# Altium PCB LAN_Tap_RJ54_x6.PcbDoc
Units mm, origin at the board's own origin, x right, y up, seen from the top; angles counter-clockwise.
Board outline 153.29 x 98.04 mm, 2 copper layers (Top Layer, Bottom Layer); 24 components, 0 nets, 288 pads, 0 vias.
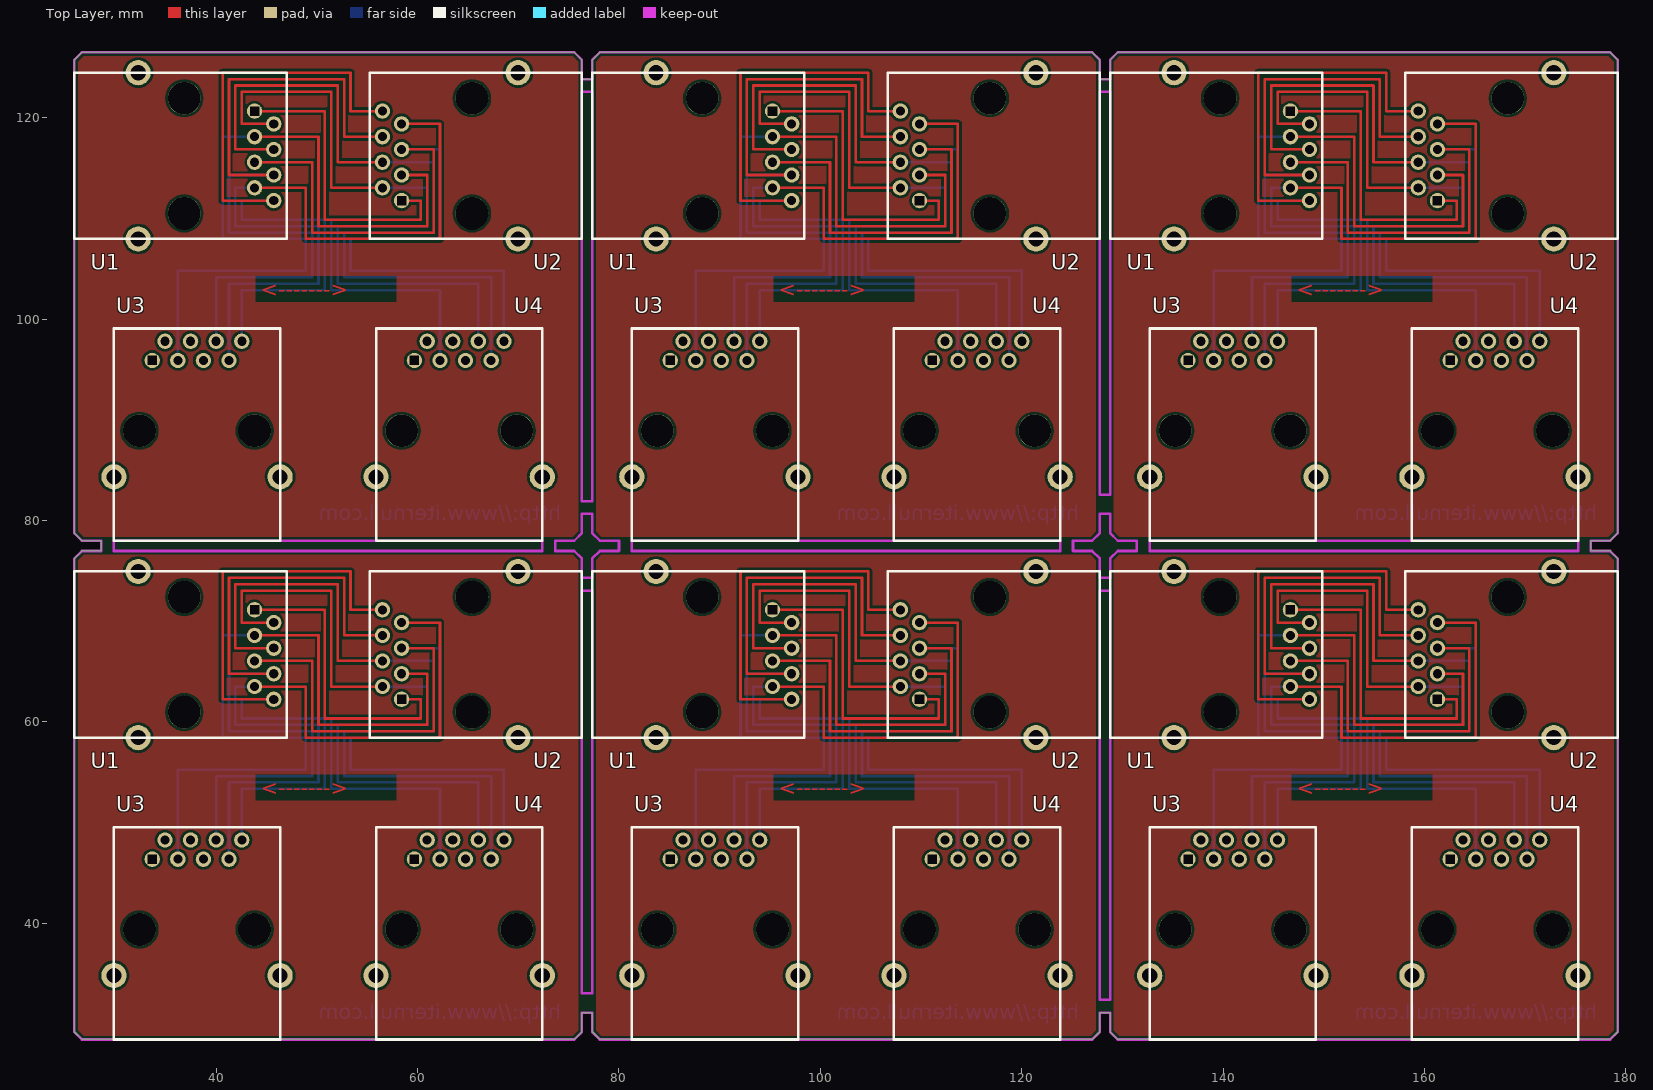
[diagram p0: Top Layer view]
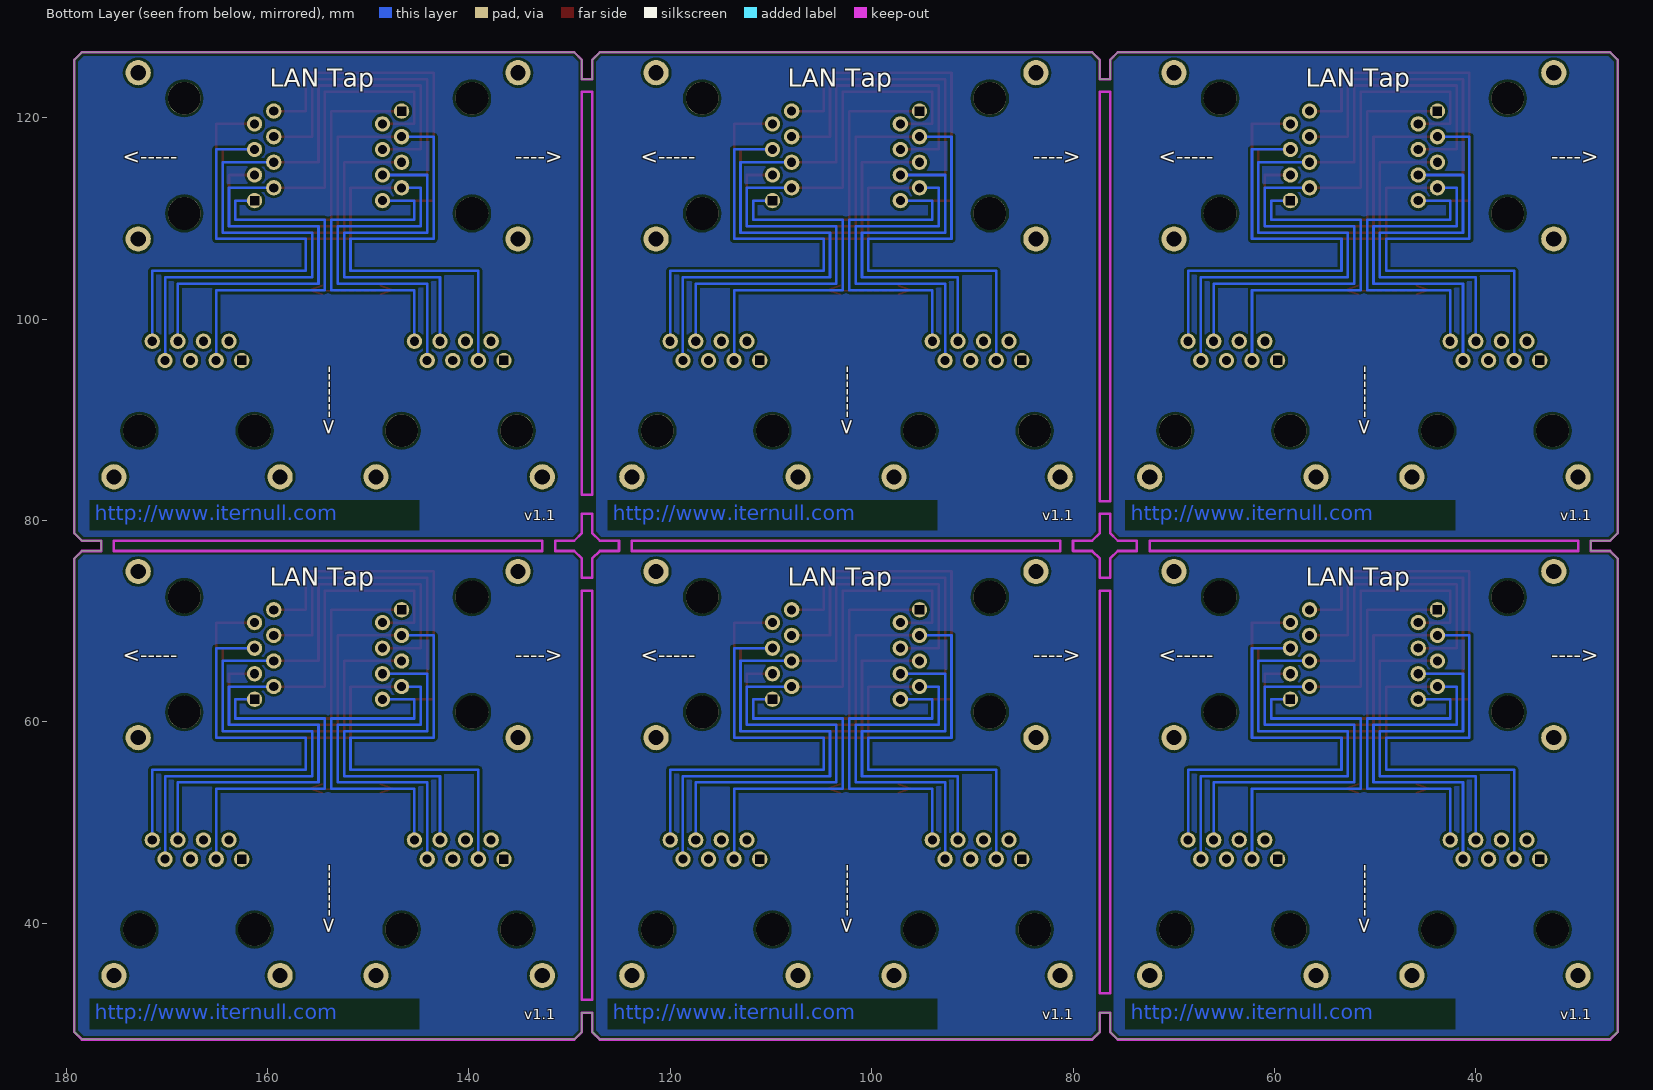
[diagram p1: Bottom Layer view, seen from below]

## Layer stack, top to bottom
Top Solder: solder mask 0.0102, Solder Resist, Dk 3.5
Top Layer: signal copper 0.0356
Dielectric 1: dielectric 0.32, FR-4, Dk 4.8
Bottom Layer: signal copper 0.0356
Bottom Solder: solder mask 0.0102, Solder Resist, Dk 3.5

## Board outline
25.908,125.73 25.908,78.74 26.67,77.978 28.448,77.978 28.575,77.978 28.575,76.962 26.67,76.962 25.908,76.2 25.908,29.21 26.67,28.448 75.565,28.448 76.327,29.21 76.327,31.115 77.343,31.115 77.343,29.21 78.105,28.448 127,28.448 127.762,29.21 127.762,31.115 128.778,31.115 128.778,29.21 129.54,28.448 178.435,28.448 179.197,29.21 179.197,76.2 178.435,76.962 176.53,76.962 176.53,77.978 178.435,77.978 179.197,78.74 179.197,125.73 178.435,126.492 129.54,126.492 128.778,125.73 128.778,123.825 127.762,123.825 127.762,125.73 127,126.492 78.105,126.492 77.343,125.73 77.343,123.825 76.327,123.825 76.327,125.73 75.565,126.492 26.67,126.492 25.908,125.73

## Design rules (kind name [scope] priority, off if disabled: settings)
Clearance [All] p1: gap=0.254
PolygonConnect [All] p1: connectstyle=Relief reliefconductorwidth=0.254 reliefentries=4 polygonreliefangle="90 Angle" airgapwidth=0.254
RoutingVias [All] p1: holewidth=0.711 width=1.27 viastyle="Through Hole" minholewidth=0.711 minwidth=1.27 maxholewidth=0.711 maxwidth=1.27
SolderMaskExpansion [All] p1: expansion=0.102
UnpouredPolygon [All] p1: allowunpoured=FALSE
Width [All] p1: maxlimit=0.254 minlimit=0.254 preferedwidth=0.254
29 further rules are at their usual default settings.

## Components (designator, comment, footprint, x,y, rotation, side; value= is the part's Value field where it differs from the comment)
U1 "RJ45" rj45 147.32,71.755 r270 top
U1 "RJ45" rj45 147.32,121.285 r270 top
U1 "RJ45" rj45 95.885,71.755 r270 top
U1 "RJ45" rj45 95.885,121.285 r270 top
U1 "RJ45" rj45 44.45,71.755 r270 top
U1 "RJ45" rj45 44.45,121.285 r270 top
U2 "RJ45" rj45 160.655,61.595 r90 top (schematic designator U1)
U2 "RJ45" rj45 160.655,111.125 r90 top (schematic designator U1)
U2 "RJ45" rj45 109.22,61.595 r90 top (schematic designator U1)
U2 "RJ45" rj45 109.22,111.125 r90 top (schematic designator U1)
U2 "RJ45" rj45 57.785,61.595 r90 top (schematic designator U1)
U2 "RJ45" rj45 57.785,111.125 r90 top (schematic designator U1)
U3 "RJ45" rj45 135.89,46.99 r0 top (schematic designator U1)
U3 "RJ45" rj45 135.89,96.52 r0 top (schematic designator U1)
U3 "RJ45" rj45 84.455,46.99 r0 top (schematic designator U1)
U3 "RJ45" rj45 84.455,96.52 r0 top (schematic designator U1)
U3 "RJ45" rj45 33.02,46.99 r0 top (schematic designator U1)
U3 "RJ45" rj45 33.02,96.52 r0 top (schematic designator U1)
U4 "RJ45" rj45 161.925,46.99 r0 top (schematic designator U1)
U4 "RJ45" rj45 161.925,96.52 r0 top (schematic designator U1)
U4 "RJ45" rj45 110.49,46.99 r0 top (schematic designator U1)
U4 "RJ45" rj45 110.49,96.52 r0 top (schematic designator U1)
U4 "RJ45" rj45 59.055,46.99 r0 top (schematic designator U1)
U4 "RJ45" rj45 59.055,96.52 r0 top (schematic designator U1)

## Footprints (in the part's own frame and the unit in brackets; to place one, negate y for a bottom-side part, rotate by r counter-clockwise, add the part's x,y. Pads: shape width x height; smd on the part's side, far side on the other; paste and mask are expansions set on the pad)
rj45 [mm]
  round 1.524 hole 0.9 square: 1(0.635,-0.635)
  round 1.524 hole 0.9: 2(1.905,1.27) 3(3.175,-0.635) 4(4.445,1.27) 5(5.715,-0.635) 6(6.985,1.27) 7(8.255,-0.635) 8(9.525,1.27)
  round 2.5 hole 1.5: 9(-3.175,-12.192) 9(13.335,-12.192)
  round 3.25 hole 3.25: 10(-0.635,-7.62) 11(10.795,-7.62)
  silkscreen extent -3.18,-18.54 13.34,2.54

## Nets (pads, with @x,y where several pads share a name; then routed paths per layer and width w, separated by ;. In a path a pad name is that pad's centre, name@x,y a point inside that pad or via, vN(x,y) a via of type N, cw(c..) or ccw(c..) an arc to the next point about the centre after c; other vN are vias at no path point)
pads on no net: U1.1 U1.2 U1.3 U1.4 U1.5 U1.6 U1.7 U1.8 U1.9 U1.10 U1.11 U2.1 U2.2 U2.3 U2.4 U2.5 U2.6 U2.7 U2.8 U2.9 U2.10 U2.11 U3.1 U3.2 U3.3 U3.4 U3.5 U3.6 U3.7 U3.8 U3.9 U3.10 U3.11 U4.1 U4.2 U4.3 U4.4 U4.5 U4.6 U4.7 U4.8 U4.9 U4.10 U4.11
copper on no net: | length 3618.7
  Top Layer w0.254: 43.815,63.5 48.895,63.5 48.895,58.42 62.23,58.42 62.23,69.85 58.547,69.85 ; 43.815,66.04 49.53,66.04 49.53,59.055 61.595,59.055 61.595,67.31 58.547,67.31 ; 43.815,68.58 50.165,68.58 50.165,59.69 60.96,59.69 60.96,64.77 58.547,64.77 ; 43.815,71.12 50.8,71.12 50.8,60.325 60.325,60.325 60.325,62.23 58.547,62.23 ; 43.815,113.03 48.895,113.03 48.895,107.95 62.23,107.95 62.23,119.38 58.547,119.38 ; 43.815,115.57 49.53,115.57 49.53,108.585 61.595,108.585 61.595,116.84 58.547,116.84 ; 43.815,118.11 50.165,118.11 50.165,109.22 60.96,109.22 60.96,114.3 58.547,114.3 ; 43.815,120.65 50.8,120.65 50.8,109.855 60.325,109.855 60.325,111.76 58.547,111.76 ; 45.72,62.23 40.64,62.23 40.64,74.93 53.34,74.93 53.34,71.12 56.515,71.12 ; 45.72,64.77 41.275,64.77 41.275,74.295 52.705,74.295 52.705,68.58 56.388,68.58 ; 45.72,67.31 41.91,67.31 41.91,73.66 52.07,73.66 52.07,66.04 56.388,66.04 ; 45.72,69.85 42.545,69.85 42.545,73.025 51.435,73.025 51.435,63.5 56.388,63.5 ; 45.72,111.76 40.64,111.76 40.64,124.46 53.34,124.46 53.34,120.65 56.515,120.65 ; 45.72,114.3 41.275,114.3 41.275,123.825 52.705,123.825 52.705,118.11 56.388,118.11 ; 45.72,116.84 41.91,116.84 41.91,123.19 52.07,123.19 52.07,115.57 56.388,115.57 ; 45.72,119.38 42.545,119.38 42.545,122.555 51.435,122.555 51.435,113.03 56.388,113.03 ; 95.25,63.5 100.33,63.5 100.33,58.42 113.665,58.42 113.665,69.85 109.982,69.85 ; 95.25,66.04 100.965,66.04 100.965,59.055 113.03,59.055 113.03,67.31 109.982,67.31 ; 95.25,68.58 101.6,68.58 101.6,59.69 112.395,59.69 112.395,64.77 109.982,64.77 ; 95.25,71.12 102.235,71.12 102.235,60.325 111.76,60.325 111.76,62.23 109.982,62.23 ; 95.25,113.03 100.33,113.03 100.33,107.95 113.665,107.95 113.665,119.38 109.982,119.38 ; 95.25,115.57 100.965,115.57 100.965,108.585 113.03,108.585 113.03,116.84 109.982,116.84 ; 95.25,118.11 101.6,118.11 101.6,109.22 112.395,109.22 112.395,114.3 109.982,114.3 ; 95.25,120.65 102.235,120.65 102.235,109.855 111.76,109.855 111.76,111.76 109.982,111.76 ; 97.155,62.23 92.075,62.23 92.075,74.93 104.775,74.93 104.775,71.12 107.95,71.12 ; 97.155,64.77 92.71,64.77 92.71,74.295 104.14,74.295 104.14,68.58 107.823,68.58 ; 97.155,67.31 93.345,67.31 93.345,73.66 103.505,73.66 103.505,66.04 107.823,66.04 ; 97.155,69.85 93.98,69.85 93.98,73.025 102.87,73.025 102.87,63.5 107.823,63.5 ; 97.155,111.76 92.075,111.76 92.075,124.46 104.775,124.46 104.775,120.65 107.95,120.65 ; 97.155,114.3 92.71,114.3 92.71,123.825 104.14,123.825 104.14,118.11 107.823,118.11 ; 97.155,116.84 93.345,116.84 93.345,123.19 103.505,123.19 103.505,115.57 107.823,115.57 ; 97.155,119.38 93.98,119.38 93.98,122.555 102.87,122.555 102.87,113.03 107.823,113.03 ; 146.685,63.5 151.765,63.5 151.765,58.42 165.1,58.42 165.1,69.85 161.417,69.85 ; 146.685,66.04 152.4,66.04 152.4,59.055 164.465,59.055 164.465,67.31 161.417,67.31 ; 146.685,68.58 153.035,68.58 153.035,59.69 163.83,59.69 163.83,64.77 161.417,64.77 ; 146.685,71.12 153.67,71.12 153.67,60.325 163.195,60.325 163.195,62.23 161.417,62.23 ; 146.685,113.03 151.765,113.03 151.765,107.95 165.1,107.95 165.1,119.38 161.417,119.38 ; 146.685,115.57 152.4,115.57 152.4,108.585 164.465,108.585 164.465,116.84 161.417,116.84 ; 146.685,118.11 153.035,118.11 153.035,109.22 163.83,109.22 163.83,114.3 161.417,114.3 ; 146.685,120.65 153.67,120.65 153.67,109.855 163.195,109.855 163.195,111.76 161.417,111.76 ; 148.59,62.23 143.51,62.23 143.51,74.93 156.21,74.93 156.21,71.12 159.385,71.12 ; 148.59,64.77 144.145,64.77 144.145,74.295 155.575,74.295 155.575,68.58 159.258,68.58 ; 148.59,67.31 144.78,67.31 144.78,73.66 154.94,73.66 154.94,66.04 159.258,66.04 ; 148.59,69.85 145.415,69.85 145.415,73.025 154.305,73.025 154.305,63.5 159.258,63.5 ; 148.59,111.76 143.51,111.76 143.51,124.46 156.21,124.46 156.21,120.65 159.385,120.65 ; 148.59,114.3 144.145,114.3 144.145,123.825 155.575,123.825 155.575,118.11 159.258,118.11 ; 148.59,116.84 144.78,116.84 144.78,123.19 154.94,123.19 154.94,115.57 159.258,115.57 ; 148.59,119.38 145.415,119.38 145.415,122.555 154.305,122.555 154.305,113.03 159.258,113.03
  Bottom Layer w0.254: 36.195,46.355 36.195,55.245 48.895,55.245 48.895,58.42 40.64,58.42 40.64,68.58 43.815,68.58 ; 36.195,95.885 36.195,104.775 48.895,104.775 48.895,107.95 40.64,107.95 40.64,118.11 43.815,118.11 ; 40.005,48.26 40.005,54.61 49.53,54.61 49.53,59.055 41.275,59.055 41.275,64.77 45.72,64.77 ; 40.005,97.79 40.005,104.14 49.53,104.14 49.53,108.585 41.275,108.585 41.275,114.3 45.72,114.3 ; 41.275,46.355 41.275,53.975 50.165,53.975 50.165,59.69 41.91,59.69 41.91,63.5 43.815,63.5 ; 41.275,95.885 41.275,103.505 50.165,103.505 50.165,109.22 41.91,109.22 41.91,113.03 43.815,113.03 ; 42.545,48.26 42.545,53.34 50.8,53.34 50.8,60.325 42.545,60.325 42.545,62.23 45.72,62.23 ; 42.545,97.79 42.545,102.87 50.8,102.87 50.8,109.855 42.545,109.855 42.545,111.76 45.72,111.76 ; 56.642,63.5 60.96,63.5 60.96,59.69 52.07,59.69 52.07,53.975 66.04,53.975 66.04,48.26 ; 56.642,66.04 61.595,66.04 61.595,59.055 52.705,59.055 52.705,54.61 67.31,54.61 67.31,46.355 ; 56.642,113.03 60.96,113.03 60.96,109.22 52.07,109.22 52.07,103.505 66.04,103.505 66.04,97.79 ; 56.642,115.57 61.595,115.57 61.595,108.585 52.705,108.585 52.705,104.14 67.31,104.14 67.31,95.885 ; 58.547,62.23 60.325,62.23 60.325,60.325 51.435,60.325 51.435,53.34 62.23,53.34 62.23,46.355 ; 58.547,67.31 62.23,67.31 62.23,58.42 53.34,58.42 53.34,55.245 68.58,55.245 68.58,48.26 ; 58.547,111.76 60.325,111.76 60.325,109.855 51.435,109.855 51.435,102.87 62.23,102.87 62.23,95.885 ; 58.547,116.84 62.23,116.84 62.23,107.95 53.34,107.95 53.34,104.775 68.58,104.775 68.58,97.79 ; 87.63,46.355 87.63,55.245 100.33,55.245 100.33,58.42 92.075,58.42 92.075,68.58 95.25,68.58 ; 87.63,95.885 87.63,104.775 100.33,104.775 100.33,107.95 92.075,107.95 92.075,118.11 95.25,118.11 ; 91.44,48.26 91.44,54.61 100.965,54.61 100.965,59.055 92.71,59.055 92.71,64.77 97.155,64.77 ; 91.44,97.79 91.44,104.14 100.965,104.14 100.965,108.585 92.71,108.585 92.71,114.3 97.155,114.3 ; 92.71,46.355 92.71,53.975 101.6,53.975 101.6,59.69 93.345,59.69 93.345,63.5 95.25,63.5 ; 92.71,95.885 92.71,103.505 101.6,103.505 101.6,109.22 93.345,109.22 93.345,113.03 95.25,113.03 ; 93.98,48.26 93.98,53.34 102.235,53.34 102.235,60.325 93.98,60.325 93.98,62.23 97.155,62.23 ; 93.98,97.79 93.98,102.87 102.235,102.87 102.235,109.855 93.98,109.855 93.98,111.76 97.155,111.76 ; 108.077,63.5 112.395,63.5 112.395,59.69 103.505,59.69 103.505,53.975 117.475,53.975 117.475,48.26 ; 108.077,66.04 113.03,66.04 113.03,59.055 104.14,59.055 104.14,54.61 118.745,54.61 118.745,46.355 ; 108.077,113.03 112.395,113.03 112.395,109.22 103.505,109.22 103.505,103.505 117.475,103.505 117.475,97.79 ; 108.077,115.57 113.03,115.57 113.03,108.585 104.14,108.585 104.14,104.14 118.745,104.14 118.745,95.885 ; 109.982,62.23 111.76,62.23 111.76,60.325 102.87,60.325 102.87,53.34 113.665,53.34 113.665,46.355 ; 109.982,67.31 113.665,67.31 113.665,58.42 104.775,58.42 104.775,55.245 120.015,55.245 120.015,48.26 ; 109.982,111.76 111.76,111.76 111.76,109.855 102.87,109.855 102.87,102.87 113.665,102.87 113.665,95.885 ; 109.982,116.84 113.665,116.84 113.665,107.95 104.775,107.95 104.775,104.775 120.015,104.775 120.015,97.79 ; 139.065,46.355 139.065,55.245 151.765,55.245 151.765,58.42 143.51,58.42 143.51,68.58 146.685,68.58 ; 139.065,95.885 139.065,104.775 151.765,104.775 151.765,107.95 143.51,107.95 143.51,118.11 146.685,118.11 ; 142.875,48.26 142.875,54.61 152.4,54.61 152.4,59.055 144.145,59.055 144.145,64.77 148.59,64.77 ; 142.875,97.79 142.875,104.14 152.4,104.14 152.4,108.585 144.145,108.585 144.145,114.3 148.59,114.3 ; 144.145,46.355 144.145,53.975 153.035,53.975 153.035,59.69 144.78,59.69 144.78,63.5 146.685,63.5 ; 144.145,95.885 144.145,103.505 153.035,103.505 153.035,109.22 144.78,109.22 144.78,113.03 146.685,113.03 ; 145.415,48.26 145.415,53.34 153.67,53.34 153.67,60.325 145.415,60.325 145.415,62.23 148.59,62.23 ; 145.415,97.79 145.415,102.87 153.67,102.87 153.67,109.855 145.415,109.855 145.415,111.76 148.59,111.76 ; 159.512,63.5 163.83,63.5 163.83,59.69 154.94,59.69 154.94,53.975 168.91,53.975 168.91,48.26 ; 159.512,66.04 164.465,66.04 164.465,59.055 155.575,59.055 155.575,54.61 170.18,54.61 170.18,46.355 ; 159.512,113.03 163.83,113.03 163.83,109.22 154.94,109.22 154.94,103.505 168.91,103.505 168.91,97.79 ; 159.512,115.57 164.465,115.57 164.465,108.585 155.575,108.585 155.575,104.14 170.18,104.14 170.18,95.885 ; 161.417,62.23 163.195,62.23 163.195,60.325 154.305,60.325 154.305,53.34 165.1,53.34 165.1,46.355 ; 161.417,67.31 165.1,67.31 165.1,58.42 156.21,58.42 156.21,55.245 171.45,55.245 171.45,48.26 ; 161.417,111.76 163.195,111.76 163.195,109.855 154.305,109.855 154.305,102.87 165.1,102.87 165.1,95.885 ; 161.417,116.84 165.1,116.84 165.1,107.95 156.21,107.95 156.21,104.775 171.45,104.775 171.45,97.79

## Polygon pours and split planes (outlines as drawn)
no net on Top Layer "Bottom Layer-No Net" (solid, pour order 15): 128.778,76.2 128.778,29.21 129.54,28.448 178.435,28.448 179.197,29.21 179.197,76.2 178.435,76.962 129.54,76.962 128.778,76.2
no net on Top Layer "Bottom Layer-No Net" (solid, pour order 15): 128.778,125.73 128.778,78.74 129.54,77.978 178.435,77.978 179.197,78.74 179.197,125.73 178.435,126.492 129.54,126.492 128.778,125.73
no net on Top Layer "Bottom Layer-No Net" (solid, pour order 15): 77.343,76.2 77.343,29.21 78.105,28.448 127,28.448 127.762,29.21 127.762,76.2 127,76.962 78.105,76.962 77.343,76.2
no net on Top Layer "Bottom Layer-No Net" (solid, pour order 15): 77.343,125.73 77.343,78.74 78.105,77.978 127,77.978 127.762,78.74 127.762,125.73 127,126.492 78.105,126.492 77.343,125.73
no net on Top Layer "Bottom Layer-No Net" (solid, pour order 15): 25.908,76.2 25.908,29.21 26.67,28.448 75.565,28.448 76.327,29.21 76.327,76.2 75.565,76.962 26.67,76.962 25.908,76.2
no net on Top Layer "Bottom Layer-No Net" (solid, pour order 15): 25.908,125.73 25.908,78.74 26.67,77.978 75.565,77.978 76.327,78.74 76.327,125.73 75.565,126.492 26.67,126.492 25.908,125.73
no net on Bottom Layer "Bottom Layer-No Net" (solid, pour order 17): 128.778,76.2 128.778,29.21 129.54,28.448 178.435,28.448 179.197,29.21 179.197,76.2 178.435,76.962 129.54,76.962 128.778,76.2
no net on Bottom Layer "Bottom Layer-No Net" (solid, pour order 17): 128.778,125.73 128.778,78.74 129.54,77.978 178.435,77.978 179.197,78.74 179.197,125.73 178.435,126.492 129.54,126.492 128.778,125.73
no net on Bottom Layer "Bottom Layer-No Net" (solid, pour order 17): 77.343,76.2 77.343,29.21 78.105,28.448 127,28.448 127.762,29.21 127.762,76.2 127,76.962 78.105,76.962 77.343,76.2
no net on Bottom Layer "Bottom Layer-No Net" (solid, pour order 17): 77.343,125.73 77.343,78.74 78.105,77.978 127,77.978 127.762,78.74 127.762,125.73 127,126.492 78.105,126.492 77.343,125.73
no net on Bottom Layer "Bottom Layer-No Net" (solid, pour order 17): 25.908,76.2 25.908,29.21 26.67,28.448 75.565,28.448 76.327,29.21 76.327,76.2 75.565,76.962 26.67,76.962 25.908,76.2
no net on Bottom Layer "Bottom Layer-No Net" (solid, pour order 17): 25.908,125.73 25.908,78.74 26.67,77.978 75.565,77.978 76.327,78.74 76.327,125.73 75.565,126.492 26.67,126.492 25.908,125.73

## Keep-outs
Keep-Out Layer:
  lines w0.254: 73.66,76.962 73.66,77.978 ; 73.66,76.962 75.565,76.962 ; 73.66,76.962 73.66,77.978 ; 73.66,77.978 75.565,77.978 ; 75.565,76.962 76.327,76.2 ; 75.565,76.962 76.327,76.2 ; 75.565,77.978 76.327,78.74 ; 75.565,77.978 76.327,78.74 ; 76.327,76.2 76.327,74.295 77.343,74.295 77.343,76.2 ; 76.327,78.74 76.327,80.645 77.343,80.645 77.343,78.74 ; 77.343,76.2 78.105,76.962 ; 77.343,76.2 78.105,76.962 ; 77.343,78.74 78.105,77.978 ; 77.343,78.74 78.105,77.978 ; 78.105,76.962 80.01,76.962 80.01,77.978 78.105,77.978 ; 125.095,76.962 125.095,77.978 ; 125.095,76.962 127,76.962 ; 125.095,76.962 125.095,77.978 ; 125.095,77.978 127,77.978 ; 127,76.962 127.762,76.2 ; 127,76.962 127.762,76.2 ; 127,77.978 127.762,78.74 ; 127,77.978 127.762,78.74 ; 127,77.978 127.762,78.74 ; 127.762,76.2 127.762,74.295 128.778,74.295 128.778,76.2 ; 127.762,78.74 127.762,80.645 128.778,80.645 128.778,78.74 ; 128.778,76.2 129.54,76.962 ; 128.778,76.2 129.54,76.962 ; 128.778,76.2 129.54,76.962 ; 128.778,78.74 129.54,77.978 ; 128.778,78.74 129.54,77.978 ; 129.54,76.962 131.445,76.962 131.445,77.978 129.54,77.978 ; 25.908,29.21 26.67,28.448 75.565,28.448 76.327,29.21 76.327,31.115 77.343,31.115 77.343,29.21 78.105,28.448 127,28.448 127.762,29.21 127.762,31.115 128.778,31.115 128.778,29.21 129.54,28.448 178.435,28.448 179.197,29.21 179.197,76.2 178.435,76.962 176.53,76.962 176.53,77.978 178.435,77.978 179.197,78.74 179.197,125.73 178.435,126.492 129.54,126.492 128.778,125.73 128.778,123.825 127.762,123.825 127.762,125.73 127,126.492 78.105,126.492 77.343,125.73 77.343,123.825 76.327,123.825 76.327,125.73 75.565,126.492 26.67,126.492 25.908,125.73 25.908,78.74 26.67,77.978 28.575,77.978 28.575,76.962 26.67,76.962 25.908,76.2 25.908,29.21 ; 29.845,76.962 72.39,76.962 72.39,77.978 29.845,77.978 29.845,76.962 ; 76.327,33.02 76.327,73.025 77.343,73.025 77.343,33.02 76.327,33.02 ; 76.327,81.915 77.343,81.915 77.343,122.555 76.327,122.555 76.327,81.915 ; 81.28,76.962 123.825,76.962 123.825,77.978 81.28,77.978 81.28,76.962 ; 127.762,32.385 128.778,32.385 128.778,73.025 127.762,73.025 127.762,32.385 ; 127.762,82.55 128.778,82.55 128.778,122.555 127.762,122.555 127.762,82.55 ; 132.715,76.962 175.26,76.962 175.26,77.978 132.715,77.978 132.715,76.962

## Other copper
Top Layer:
  text "<------->" at 44.45,102.235 h1.52
  text "<------->" at 95.885,102.235 h1.52
  text "<------->" at 147.32,102.235 h1.52
  text "<------->" at 44.45,52.705 h1.52
  text "<------->" at 95.885,52.705 h1.52
  text "<------->" at 147.32,52.705 h1.52
Bottom Layer:
  text "http://www.iternull.com" at 74.295,80.01 h1.5
  text "http://www.iternull.com" at 125.73,80.01 h1.5
  text "http://www.iternull.com" at 177.165,80.01 h1.5
  text "http://www.iternull.com" at 74.295,30.48 h1.5
  text "http://www.iternull.com" at 125.73,30.48 h1.5
  text "http://www.iternull.com" at 177.165,30.48 h1.5

## Silkscreen, mask and mechanical layers (free items; w line width, h text height)
Bottom Overlay:
  text "LAN Tap" at 56.896,123.063 h1.8
  text "LAN Tap" at 108.331,123.063 h1.8
  text "LAN Tap" at 159.766,123.063 h1.8
  text "<----" at 27.813,115.443 h1.52
  text "----->" at 66.04,115.443 h1.52
  text "<----" at 79.248,115.443 h1.52
  text "----->" at 117.475,115.443 h1.52
  text "<----" at 130.683,115.443 h1.52
  text "----->" at 168.91,115.443 h1.52
  text "------->" at 50.419,95.377 h1.52 r270
  text "------->" at 101.854,95.377 h1.52 r270
  text "------->" at 153.289,95.377 h1.52 r270
  text "v1.1" at 31.623,80.01 h1
  text "v1.1" at 83.058,80.01 h1
  text "v1.1" at 134.493,80.01 h1
  text "LAN Tap" at 56.896,73.533 h1.8
  text "LAN Tap" at 108.331,73.533 h1.8
  text "LAN Tap" at 159.766,73.533 h1.8
  text "<----" at 27.813,65.913 h1.52
  text "----->" at 66.04,65.913 h1.52
  text "<----" at 79.248,65.913 h1.52
  text "----->" at 117.475,65.913 h1.52
  text "<----" at 130.683,65.913 h1.52
  text "----->" at 168.91,65.913 h1.52
  text "------->" at 50.419,45.847 h1.52 r270
  text "------->" at 101.854,45.847 h1.52 r270
  text "------->" at 153.289,45.847 h1.52 r270
  text "v1.1" at 31.623,30.48 h1
  text "v1.1" at 83.058,30.48 h1
  text "v1.1" at 134.493,30.48 h1